# Altium PCB PW-Sat2_EPS_EM_Ideal-Diode-CH0.PcbDoc
Units mil, origin at the board's own origin, x right, y up, seen from the top; angles counter-clockwise.
Board outline 1070 x 1420 mil, 2 copper layers (Top Layer, Bottom Layer), stack 61.855 mil thick; 18 components, 8 nets, 53 pads, 0 vias.
Unrouted connection lines stored in the file: 1.
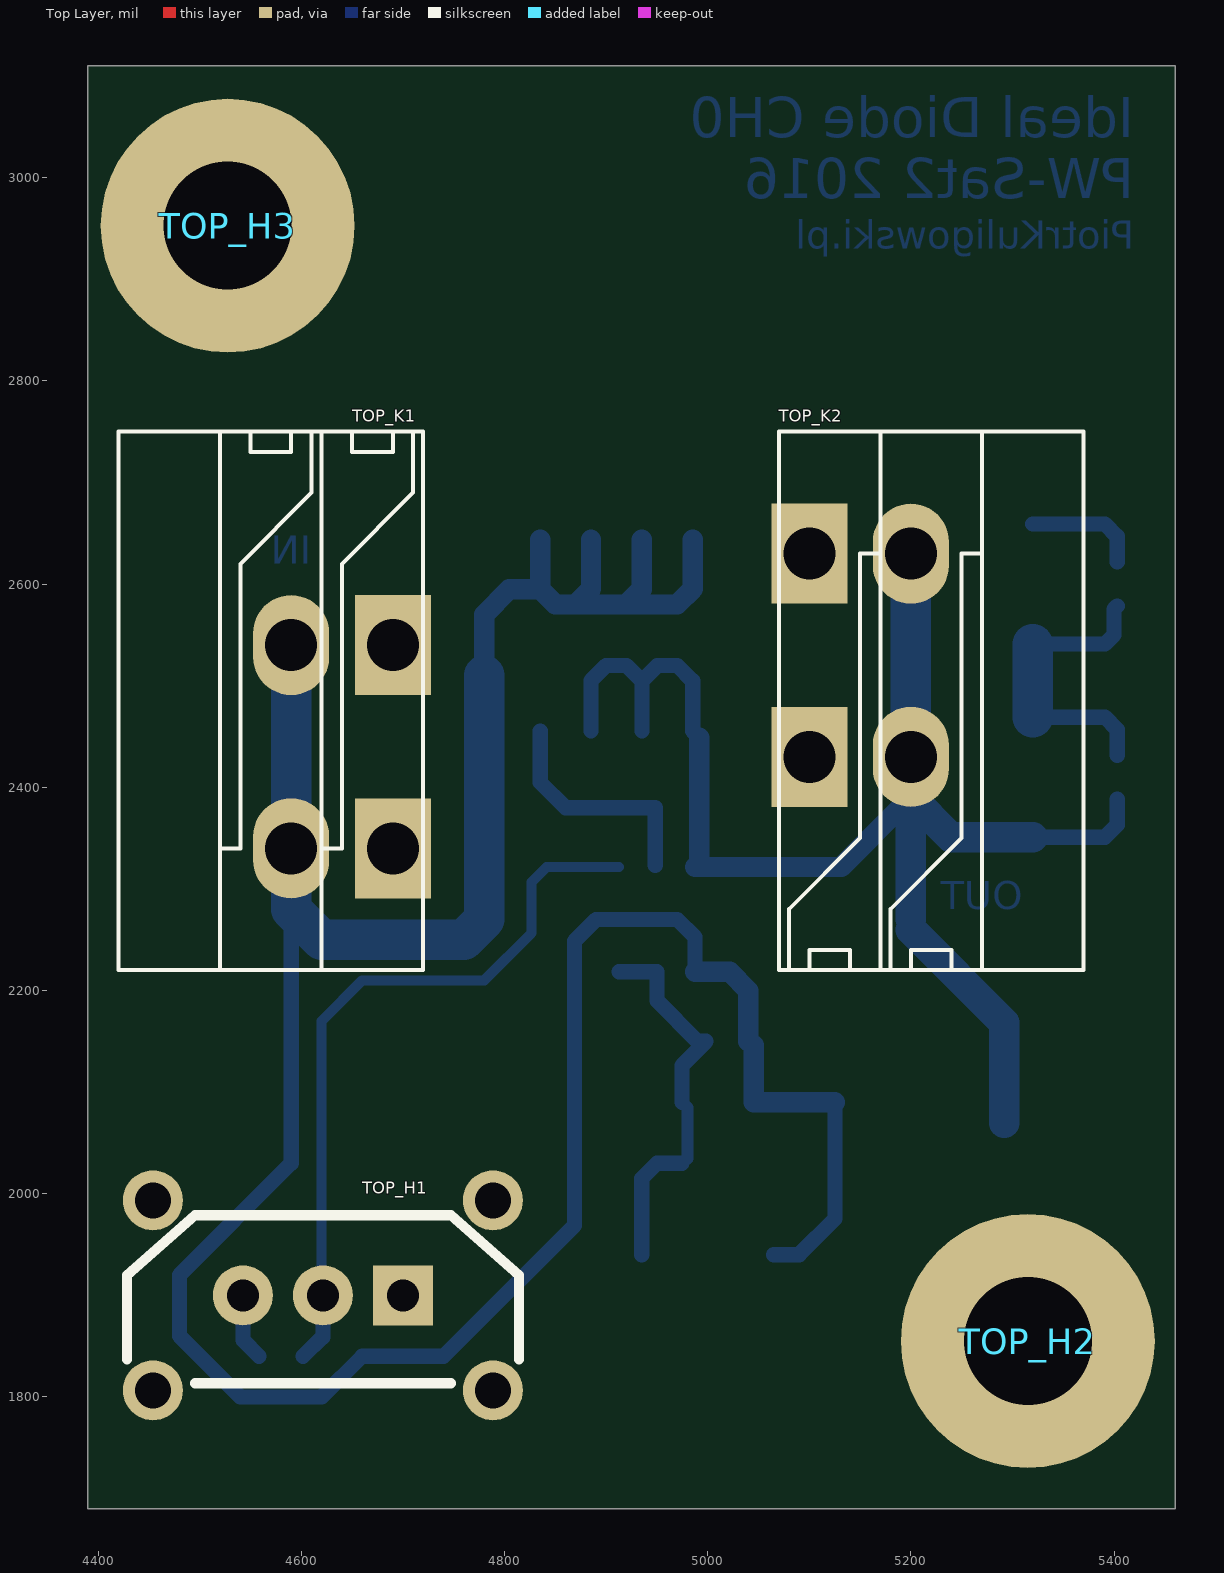
[diagram p0: Top Layer view]
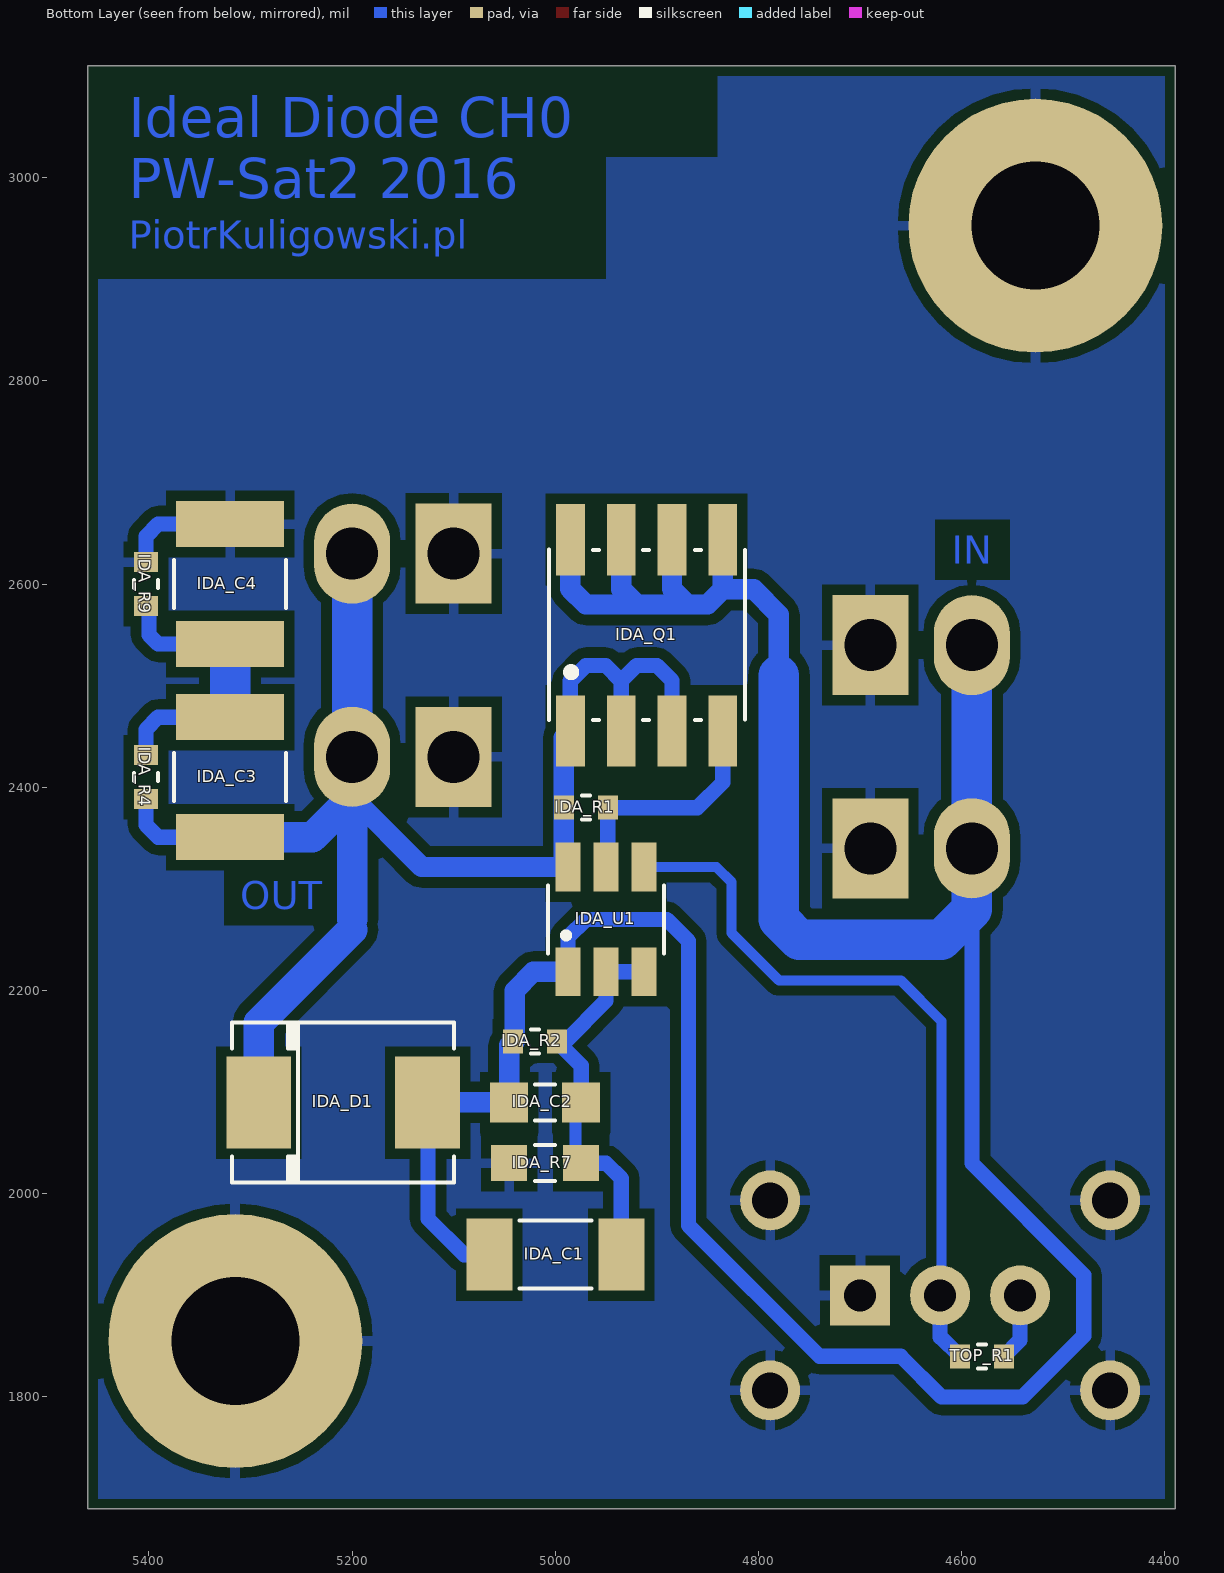
[diagram p1: Bottom Layer view, seen from below]
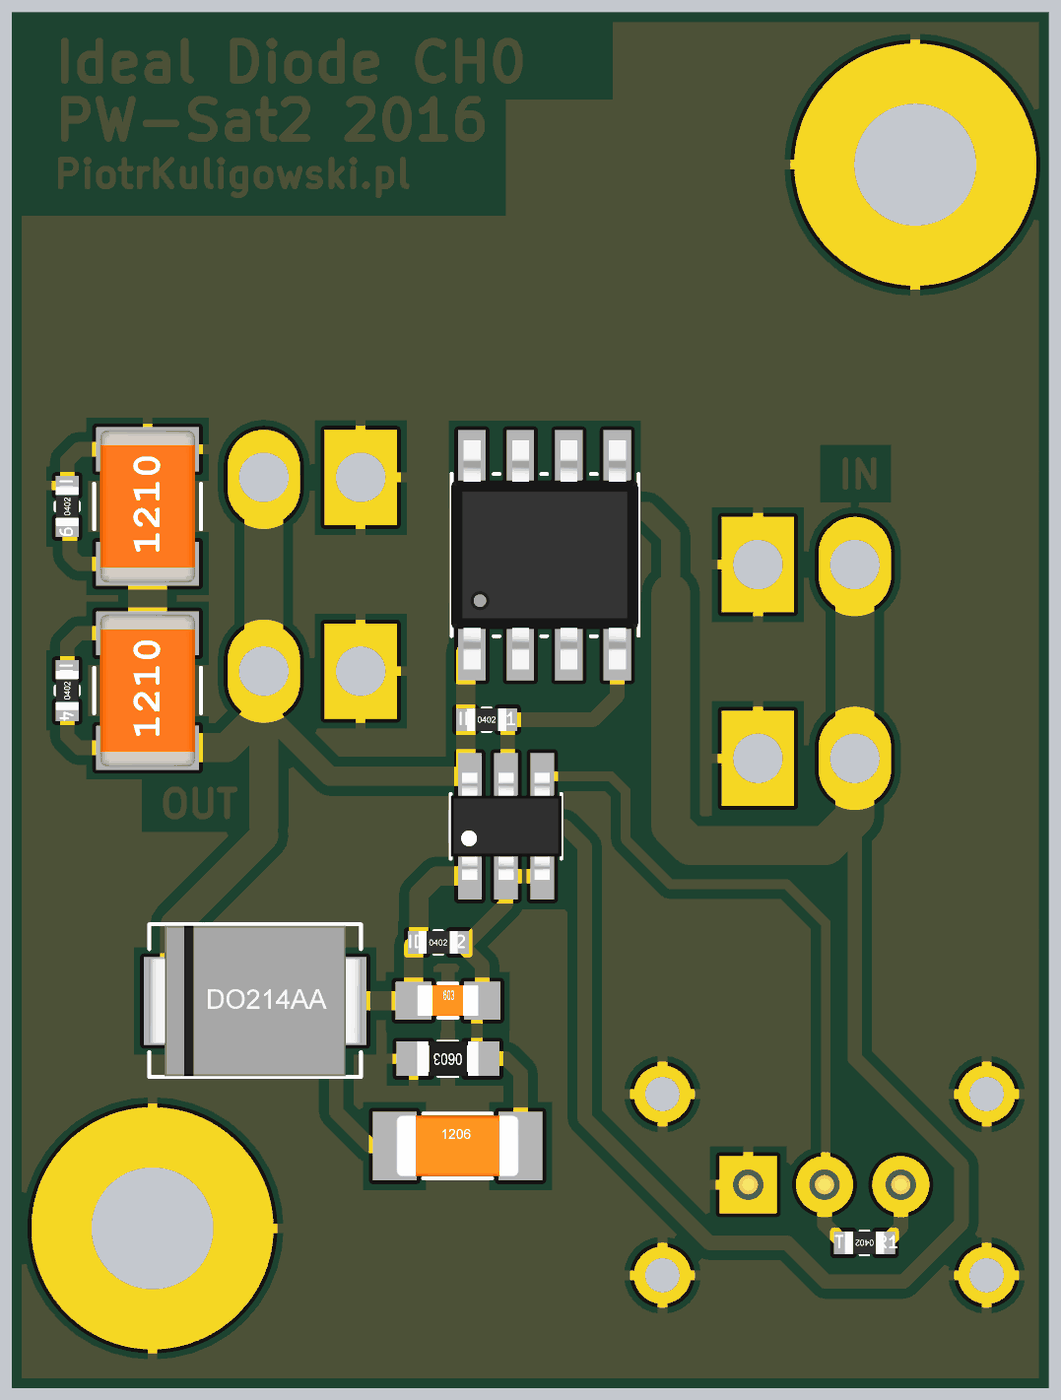
[diagram p2: 3D render of the assembled board from below, using the file's embedded part models]

## Layer stack, top to bottom
Top Layer: signal copper 1.4
Dielectric 1: core 59.0551, FR-4, Dk 4.2
Bottom Layer: signal copper 1.4

## Board outline
4390,1690 4390,3110 5460,3110 5460,1690

## Design rules (kind name [scope] priority, off if disabled: settings)
Clearance [All] p1: gap=10
ComponentClearance [All] p1: gap=10 collisioncheckmode=3 verticalgap=-0.04 showdistances=FALSE
PolygonConnect [All] p1: connectstyle=Relief reliefconductorwidth=10 reliefentries=4 polygonreliefangle="90 Angle" airgapwidth=10
RoutingVias [All] p1: holewidth=28 width=50 viastyle="Through Hole" minholewidth=28 minwidth=50 maxholewidth=28 maxwidth=50
SolderMaskExpansion [All] p1: expansion=4
Width [All] p1: maxlimit=50 minlimit=10 preferedwidth=10
29 further rules are at their usual default settings.

## Classes and differential pairs
component class "Ideal Diode CH0": IDA_C1 IDA_C2 IDA_C3 IDA_C4 IDA_D1 IDA_Q1 IDA_R1 IDA_R2 IDA_R4 IDA_R7 IDA_R9 IDA_U1
component class top_power: TOP_H1 TOP_H2 TOP_K1 TOP_K2 TOP_R1

## Components (designator, comment, footprint, x,y, rotation, side; value= is the part's Value field where it differs from the comment)
IDA_C1 "1u/25V" SMD_Capacitor_1206 5000,1940 r180 bottom
IDA_C2 "100n/50V" SMD_Capacitor_0603 5010,2090 r180 bottom
IDA_C3 "10u/25V" SMD_Capacitor_1210 5320,2410 r90 bottom
IDA_C4 "10u/25V" SMD_Capacitor_1210 5320,2600 r90 bottom
IDA_D1 "STPS340U" DO-214AA 5210,2090 r180 bottom
IDA_Q1 "IRF7416" SOIC-8-N_SSSGDDDD 4910,2550 r90 bottom
IDA_R1 "100k/1%" SMD_Resistor_0402 4970,2380 r180 bottom
IDA_R2 "470k/1%" SMD_Resistor_0402 5020,2150 r180 bottom
IDA_R4 "470k/1%" SMD_Resistor_0402 5402.97,2410 r90 bottom
IDA_R7 "1k/1%" SMD_Resistor_0603 5010,2030 r0 bottom
IDA_R9 "470k/1%" SMD_Resistor_0402 5402.97,2600 r90 bottom
IDA_U1 "LTC4412" SOT23-6 4950,2270 r90 bottom
TOP_H1 "IDStatCH0" Harwin_Datamate_L-Tek_M80-8770305 4700,1900 r180 top
TOP_H2 "Mounting Hole" PC-104_PcbMntHole_M3 5315,1855 r0 top
TOP_H3 "Mounting Hole" PC-104_PcbMntHole_M3 4527.56,2952.76 r0 top
TOP_K1 "TB-2.5-PD-xx" TerminalBlock_Spring_2.54_2-R 4690,2340 r90 top
TOP_K2 "TB-2.5-PD-xx" TerminalBlock_Spring_2.54_2-R 5100,2630 r270 top
TOP_R1 "100k/1%" SMD_Resistor_0402 4580,1840 r0 bottom

## Footprints (in the part's own frame and the unit in brackets; to place one, negate y for a bottom-side part, rotate by r counter-clockwise, add the part's x,y. Pads: shape width x height; smd on the part's side, far side on the other; paste and mask are expansions set on the pad)
DO-214AA [mm] "JEDEC standard. SMB."
  rect 1.62x2.3 smd: A(2.14,-0.01) K(-2.08,-0.01)
  silkscreen extent -2.75,-2 2.8,2, body extent -2.76,-1.98 2.82,1.96, height 2.65
Harwin_Datamate_L-Tek_M80-8770305 [mm] "Harwin Datamate L-Teck M80-8770305, 2mm pitch, 1x3pin."
  round 1.5 hole 0.9: 0(-2.25,2.375) 0(-2.25,-2.375) 0(6.25,-2.375) 0(6.25,2.375)
  rect 1.5x1.5 hole 0.8: 1(0,0)
  round 1.5 hole 0.8: 2(2,0) 3(4,0)
  silkscreen extent -2.9,-2 6.9,2.2, body extent -2.95,-1.77 6.95,2.08, height 8.21
PC-104_PcbMntHole_M3 [mm] "PCB Mounting Hole for PC-104 standard. Based on Pumpkin's Kit."
  round 6.35 hole 3.2: 1(0,0)
SMD_Capacitor_0603 [mm] "SMD Capacitor, Inch 0603, Metric 1608."
  rect 0.95x1 smd: 1(-0.9,0) 2(0.9,0)
  silkscreen extent -0.25,-0.45 0.25,0.45, body extent -0.8,-0.4 0.8,0.4, height 0.3
SMD_Capacitor_1206 [mm] "SMD Capacitor, Inch 1206, Metric 3216."
  rect 1.15x1.8 smd: 1(-1.65,0) 2(1.65,0)
  silkscreen extent -0.9,-0.85 0.9,0.85, body extent -1.6,-0.8 1.6,0.8, height 1
SMD_Capacitor_1210 [mm] "SMD Capacitor, Inch 1210, Metric 3225."
  rect 1.15x2.7 smd: 1(-1.5,0) 2(1.5,0)
  silkscreen extent -0.6,-1.4 0.6,1.4, body extent -2,-1.24 2,1.24, height 1.7
SMD_Resistor_0402 [mm] "SMD Resistor, Inch 0402, Metric 1005."
  rect 0.5x0.6 smd: 1(-0.55,0) 2(0.55,0)
  silkscreen extent -0.1,-0.3 0.1,0.3, body extent -0.52,-0.3 0.52,0.3, height 0.34
SMD_Resistor_0603 [mm] "SMD Resistor, Inch 0603, Metric 1608."
  rect 0.9x0.9 smd: 1(-0.9,0) 2(0.9,0)
  silkscreen extent -0.25,-0.45 0.25,0.45, body extent -0.8,-0.45 0.8,0.45, height 0.5
SOIC-8-N_SSSGDDDD [mm] "JEDEC standard. SO-8. SSSGDDDD."
  rect 1.78x0.72 smd: D(2.38,-1.9) D(2.38,-0.63) D(2.38,0.64) D(2.38,1.91) G(-2.4,-1.9) S(-2.4,-0.63) S(-2.4,0.64) S(-2.4,1.91)
  silkscreen extent -2.13,-2.46 2.13,2.44, body extent -3,-2.45 3,2.45, height 1.7
SOT23-6 [mm] "JEDEC MO-178AB package."
  rect 1.22x0.62 smd: 1(-1.31,0.95) 2(-1.31,0) 3(-1.31,-0.95) 4(1.31,-0.95) 5(1.31,0) 6(1.31,0.95)
  silkscreen extent -0.85,-1.45 0.85,1.45, body extent -1.4,-1.45 1.4,1.45, height 1.45
TerminalBlock_Spring_2.54_2-R [mm] "Terminal block with spring, 2.54mm pitch, right angle, 2-pin."
  rect 2.5x1.9 hole 1.3: 1(0,0) 1(5.08,0)
  oval 2.5x1.9 hole 1.3: 2(0,2.54) 2(5.08,2.54)
  silkscreen extent -3.05,-0.76 10.41,6.86, body extent -3.05,-0.74 10.41,6.86, height 12.6

## Part data
IDA_C1: library part Cer_C1206T105K3RALTU, "Ceramic Cap Kemet COTS 1u/25V X7R 1206"
IDA_C2: library part Cer_GCJ188R71H104KA12D, "Ceramic Cap Murata Automotive 100n/50V X7R 0603"
IDA_C3 IDA_C4: library part Cer_GCJ32ER71E106KA12L, "Ceramic Cap Murata Automotive 10u/25V X7R 1210"
IDA_D1: library part STPS340x, "3A/40V Power Schottky Rectifier."
IDA_Q1: "10A/30V HEXFET Power P-MOSFET."
IDA_R1 TOP_R1: library part CRCW0402100KFKxxxx, "100k/1% Vishay CRCW 0402 Resistor. 63mW, 100ppm, 50V."
IDA_R2 IDA_R4 IDA_R9: library part CRCW0402470KFKxxxx, "470k/1% Vishay CRCW 0402 Resistor. 63mW, 100ppm, 50V."
IDA_R7: library part CRCW06031K00FKxxxx, "1k/1% Vishay CRCW 0603 Resistor. 100mW, 100ppm, 75V."
IDA_U1: "Ideal Diode, Low Loss PowerPath Controller."
TOP_H1: library part Harwin_Datamate_L-Tek_1x3pin, "Harwin DataMate L-Tek, 2mm pitch, 1x3pin."
TOP_H2 TOP_H3: library part MntHole, "PCB Mounting Hole"
TOP_K1 TOP_K2: library part TerminalBlock_Spring_2.54_2-R, "Terminal block with spring, 2-pin, 2.54mm pitch, right angle."

## Nets (pads, with @x,y where several pads share a name; then routed paths per layer and width w, separated by ;. In a path a pad name is that pad's centre, name@x,y a point inside that pad or via, vN(x,y) a via of type N, cw(c..) or ccw(c..) an arc to the next point about the centre after c; other vN are vias at no path point)
IDSTATCH0: IDA_U1.4 TOP_H1.2 TOP_R1.2 | length 737.8
  Bottom Layer w10: TOP_H1.2@4610,1890 4620,1900 4620,2170 4660,2210 4780,2210 4826.5,2256.5 4826.5,2306.5 4841.57,2321.57 IDA_U1.4
  Bottom Layer w15: TOP_R1.2 4621.26,1859.61 ; 4621.26,1858.74 4621.26,1859.61 ; TOP_H1.2 4621.26,1859.61
NetIDA_C1_1: IDA_C1.1 IDA_C2.1 IDA_D1.A IDA_Q1.D IDA_R2.1 IDA_U1.1 TOP_K1.2 | length 3075.5
  Bottom Layer w15: 4590,2280 4590,2030 4480,1920 4480,1860 4540,1800 4620,1800 4660,1840 4740,1840 4868.84,1968.84 4868.84,2248.84 4890,2270 4970,2270 4987.4,2252.6 IDA_U1.1 ; 4934.8,2594.8 4935.2,2594.8 ; IDA_R2.1 IDA_R2.1@5045.43,2146.22 ; IDA_C1.1 5090,1940 5125.35,1975.35 IDA_D1.A@5125.35,2090
  Bottom Layer w20: 4780,2510 4780,2570 4804.8,2594.8 4835.2,2594.8 ; IDA_Q1.D@4835.2,2643.7 4835.2,2594.8 ; IDA_Q1.D@4885.2,2643.7 4885.2,2595.2 4870,2580 ; 4934.8,2594.8 4920,2580 ; 4935.2,2594.8 IDA_Q1.D@4935.2,2643.7 ; IDA_Q1.D@4985.2,2643.7 4985.2,2595.2 4970,2580 4920,2580 ; IDA_U1.1 5021.57,2218.43 5040,2200 IDA_R2.1@5040,2150 ; IDA_R2.1@5045.43,2146.22 IDA_C2.1 IDA_D1.A@5125.35,2090 ; 4835.2,2594.8 4850,2580 4870,2580 ; 4870,2580 4920,2580
  Bottom Layer w40: TOP_K1.2@4590,2540 4590,2340 4590,2280 4620,2250 4760,2250 4780,2270 4780,2510
NetIDA_C1_2: IDA_C1.2 IDA_C2.2 IDA_R2.2 IDA_R7.1 IDA_U1.2 IDA_U1.3 | length 379
  Bottom Layer w12: IDA_C2.2 4980,2084.57 IDA_R7.1@4980,2034.59
  Bottom Layer w15: IDA_U1.3 IDA_U1.2 4950,2190 4990,2150 IDA_R2.2 4974.57,2126.22 IDA_C2.2 ; IDA_C1.2 4935.04,2015.04 4950,2030 IDA_R7.1
NetIDA_C3_1: IDA_C3.1 IDA_D1.K IDA_Q1.S IDA_R1.1 IDA_R4.1 IDA_U1.6 TOP_K2.2 | length 1480.6
  Bottom Layer w15: IDA_Q1.S@4885.2,2455.51 4885.2,2505.2 4900,2520 4920,2520 4935.2,2504.8 ; IDA_Q1.S@4935.2,2455.51 4935.2,2504.8 ; IDA_U1.6 IDA_U1.6@4991.65,2325.83 ; IDA_Q1.S@4991.65,2449.05 4985.2,2455.51 4985.2,2504.8 4970,2520 4950.39,2520 4935.2,2504.8 ; IDA_C3.1 5390.94,2350.94 5402.97,2362.97 IDA_R4.1
  Bottom Layer w20: IDA_U1.6 5131.57,2321.57 5200,2390 TOP_K2.2@5200,2430 ; IDA_U1.6@4991.65,2325.83 IDA_R1.1 IDA_Q1.S@4991.65,2449.05
  Bottom Layer w30: 5200,2260 5291.89,2168.11 IDA_D1.K@5291.89,2069.61 ; 5200,2270 5200,2380 ; TOP_K2.2@5200,2390 5239.06,2350.94 IDA_C3.1
  Bottom Layer w40: TOP_K2.2@5200,2430 TOP_K2.2@5200,2630
NetIDA_C3_2: IDA_C3.2 IDA_C4.1 IDA_R4.2 IDA_R9.1 | length 298.5
  Bottom Layer w15: IDA_C3.2 5390.94,2469.06 5402.97,2457.03 IDA_R4.2 ; IDA_C4.1 5390.94,2540.94 5400,2550 5400,2575.38 IDA_R9.1
  Bottom Layer w40: IDA_C3.2 IDA_C4.1
NetIDA_Q1_G: IDA_Q1.G IDA_R1.2 IDA_U1.5 | length 233.2
  Bottom Layer w10: IDA_U1.5@4948.35,2323.23 IDA_U1.5
  Bottom Layer w15: IDA_Q1.G 4835.2,2404.8 4860,2380 IDA_R1.2 IDA_U1.5@4948.35,2323.23
NetTOP_H1_3: TOP_H1.3 TOP_R1.1 | length 66.6
  Bottom Layer w15: TOP_H1.3 4542.52,1855.83 TOP_R1.1
PGND: IDA_C4.2 IDA_R7.2 IDA_R9.2 TOP_H1.0 TOP_H1.1 TOP_H2.1 TOP_H3.1 TOP_K1.1 TOP_K2.1 | length 129.1
  Bottom Layer w15: IDA_C4.2 5390.94,2659.06 5402.97,2647.03 IDA_R9.2
  Bottom Layer w20: TOP_H1.1 TOP_H1.1@4711.16,1911.16

## Polygon pours and split planes (outlines as drawn)
PGND on Bottom Layer "PGND Polygon" (solid, remove dead copper, pour order 0): 4400,3100 4400,1700 5450,1700 5450,3100

## Other copper
Bottom Layer:
  pour cut-out: 4840,3100 4840,3020 4950,3020 4950,2900 5450,2900 5450,3100
  text "Ideal Diode CH0" at 5420,3040 h39.37
  text "PW-Sat2 2016" at 5420,2980 h39.37
  text "PiotrKuligowski.pl" at 5420,2930 h27.56
  text "IN" at 4610,2620 h27.56
  text "OUT" at 5310,2280 h27.56

## Silkscreen, mask and mechanical layers (free items; w line width, h text height)
Mechanical 1:
  the board outline again, w10